# EAGLE board ottawa-badge-panel (EAGLE 5.12)
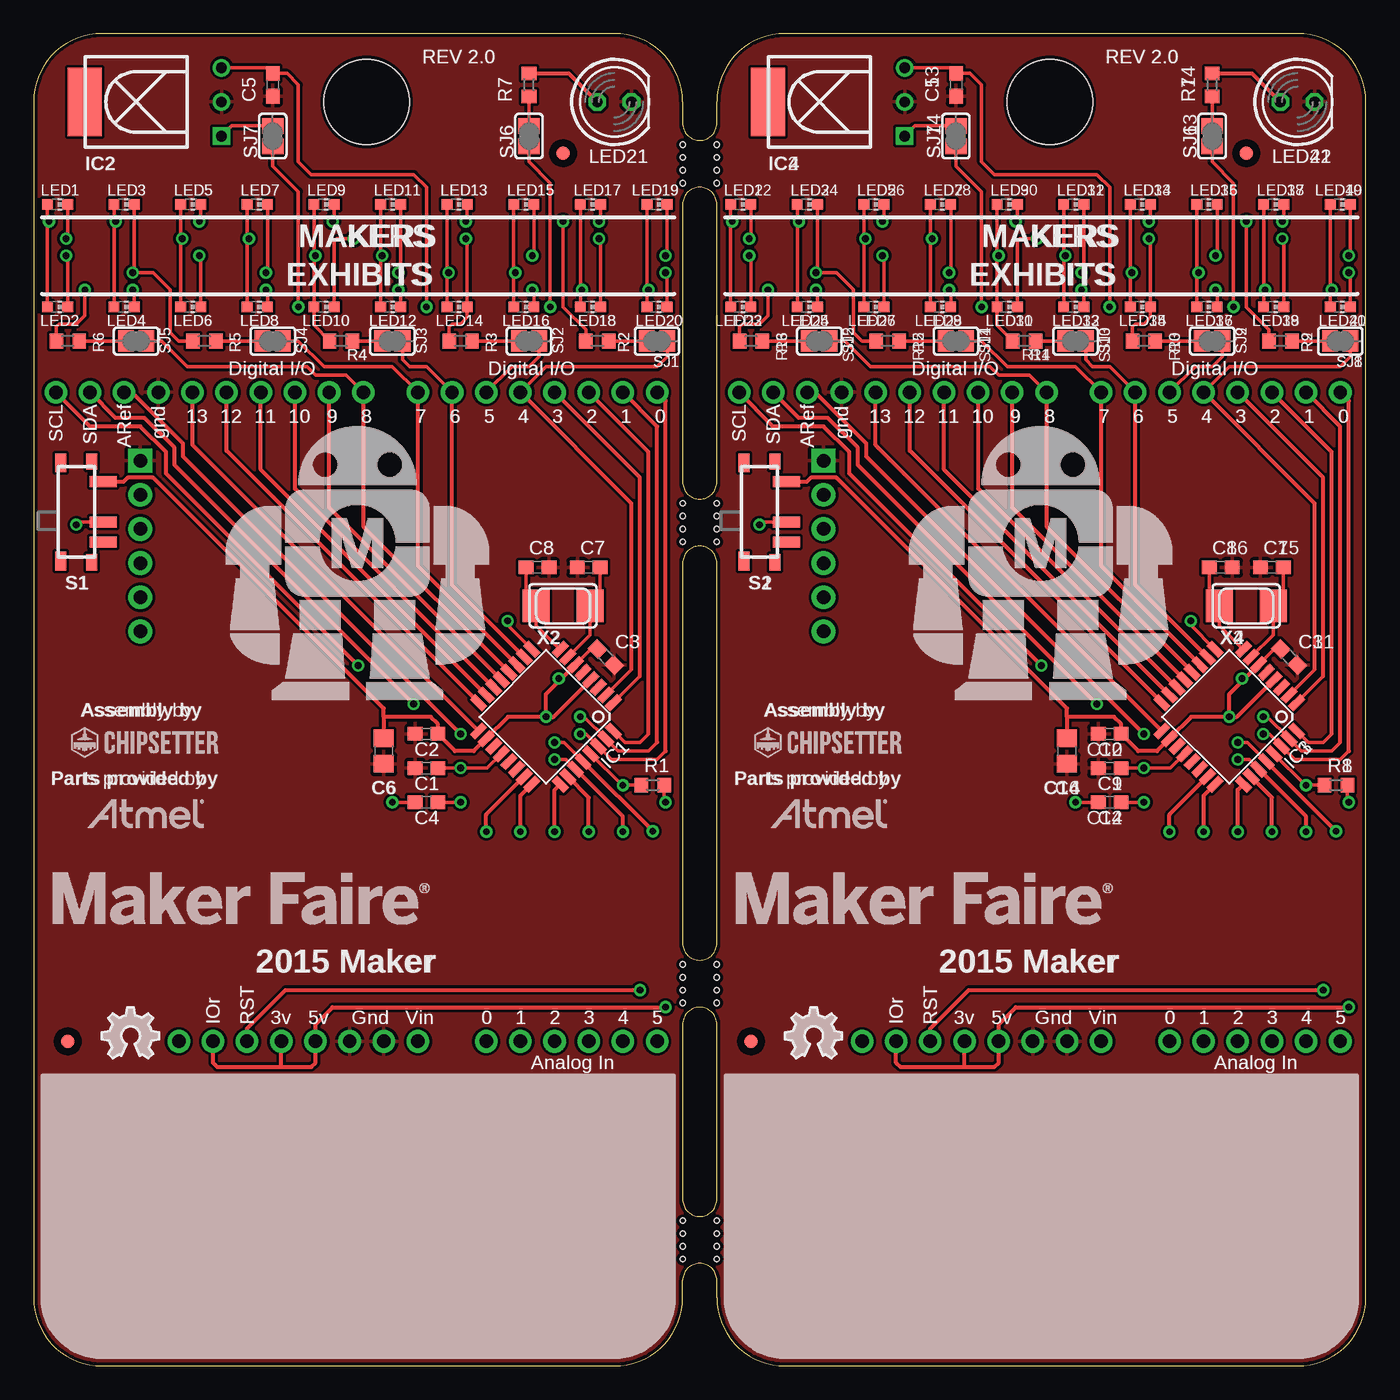
[diagram p0: board, top side]
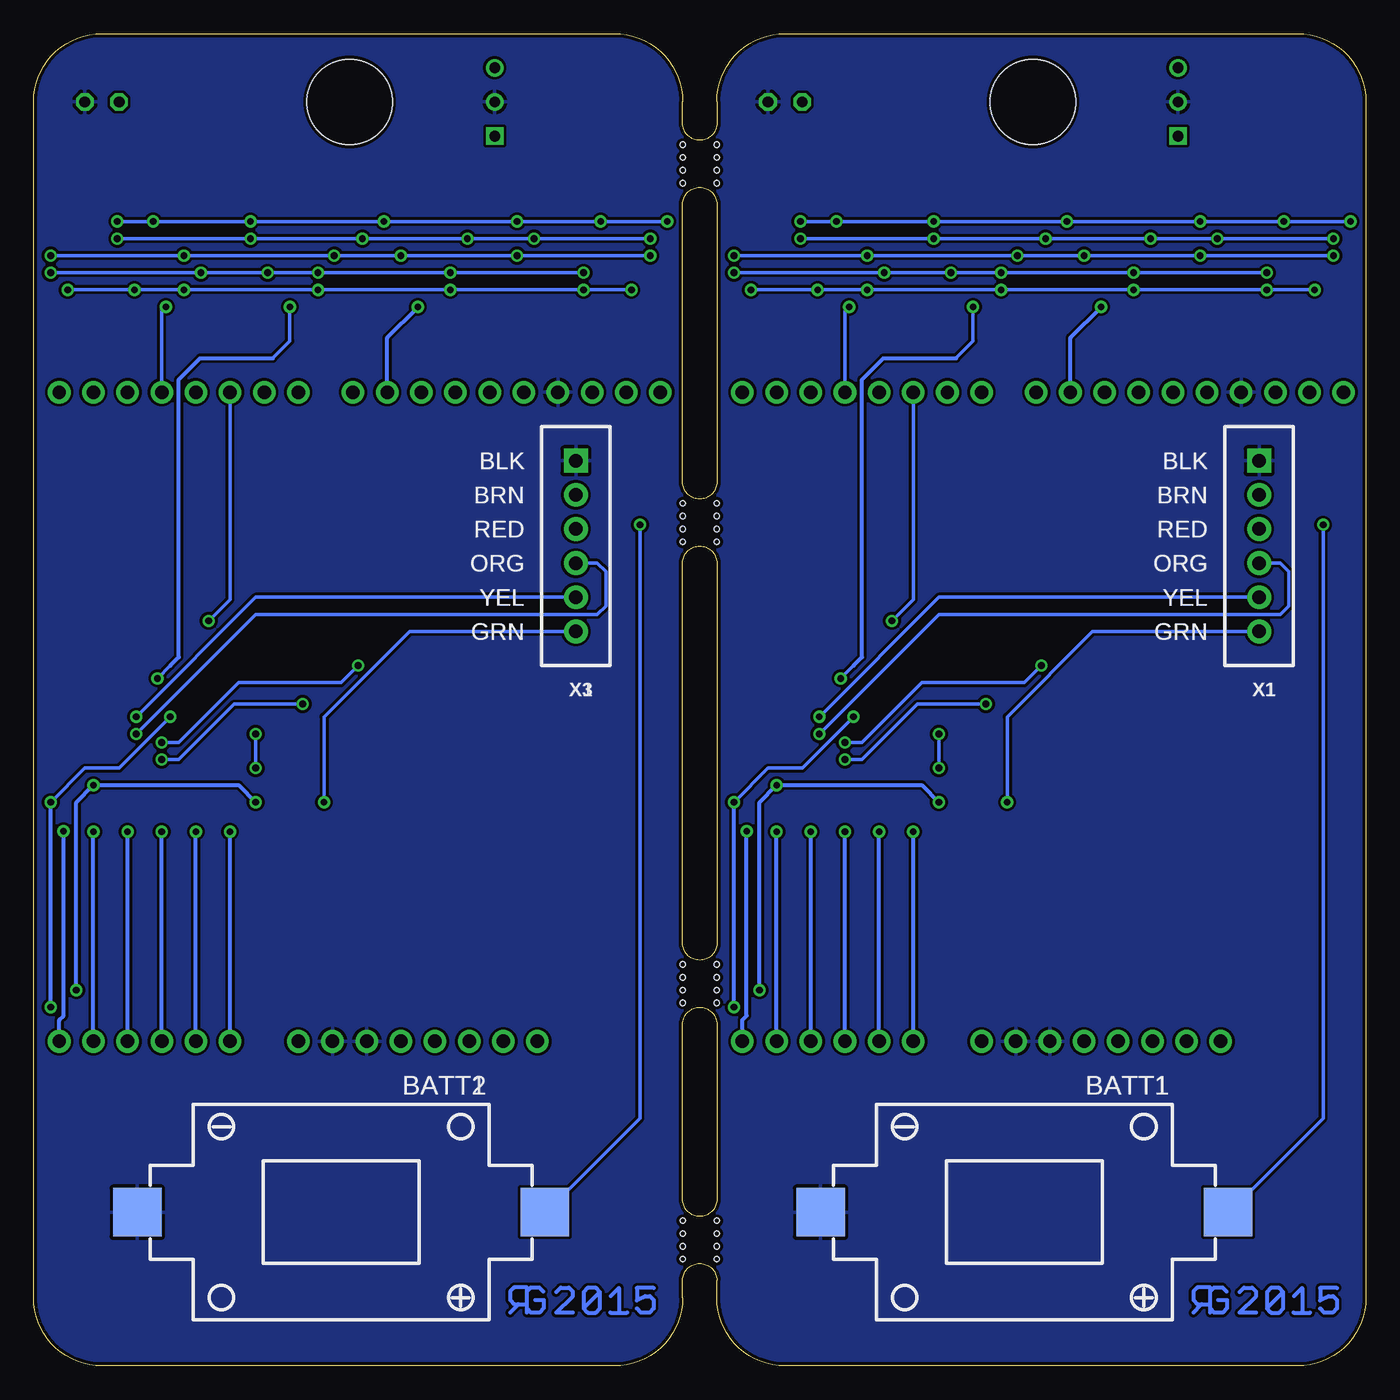
[diagram p1: board, bottom side, seen from below]

Size 99.06 x 99.06 mm. Coordinates in mm from the lower left corner, seen from the top.
Outline: 5.08,99.06 arc90 0,93.98 0,5.08 arc90 5.08,0 43.18,0 arc90 48.26,5.08 48.26,6.35 arc-90 49.53,7.62 arc-90 50.8,6.35 50.8,5.08 arc90 55.88,0 93.98,0 arc90 99.06,5.08 99.06,93.98 arc90 93.98,99.06 55.88,99.06 arc90 50.8,93.98 50.8,92.39 arc-90 49.53,91.12 arc-90 48.26,92.39 48.26,93.98 arc90 43.18,99.06 5.08,99.06
Outline: 50.8,86.36 arc90 49.53,87.63 arc90 48.26,86.36 48.26,65.72 arc90 49.53,64.45 arc90 50.8,65.72 50.8,86.36
Outline: 48.26,12.38 arc90 49.53,11.11 arc90 50.8,12.38 50.8,25.4 arc90 49.53,26.67 arc90 48.26,25.4 48.26,12.38
Outline: 48.26,31.43 arc90 49.53,30.16 arc90 50.8,31.43 50.8,59.69 arc90 49.53,60.96 arc90 48.26,59.69 48.26,31.43
Copper layers (1*16): Top 0.035mm / dielectric 1.5mm / Bottom 0.035mm
Design rules "default *": minimum track width 10mil, minimum drill 0.5mm, track to track 8mil, track to pad 8mil, pad to pad 8mil, via to via 8mil, smd to smd 8mil, copper to edge 10mil, drill to drill 8mil, minimum pad ring 10mil, minimum via ring 8mil, stop-mask expansion 4mil, vias tented up to drill 20mil, thermal gap 10mil
Holes 6.35 mm at 24.77,93.98 75.56,93.98
Holes 0.4 mm at 48.26,90.81 48.26,89.85 48.26,88.9 48.26,87.95 50.8,90.81 50.8,89.85 50.8,88.9 50.8,87.95 48.26,10.79 48.26,9.84 48.26,8.89 48.26,7.94 50.8,10.79 50.8,9.84 50.8,8.89 50.8,7.94 48.26,29.84 48.26,28.89 48.26,27.94 48.26,26.99 50.8,29.84 50.8,28.89 50.8,27.94 50.8,26.99 48.26,64.14 48.26,63.18 48.26,62.23 48.26,61.28 50.8,64.14 50.8,63.18 50.8,62.23 50.8,61.28

## Footprints (pad centres in the part's own frame; a part is rotated, then mirrored left to right if it is on the bottom)
2032SMD = smd 3.6 x 3.6: + -15.15,0; - 15.15,0
C0603 = smd 1.1 x 1: 1 -0.85,0; 2 0.85,0
C0805 = smd 1.3 x 1.5: 1 -0.95,0; 2 0.95,0
TQFP32-08 = smd 1.27 x 0.559: 1 -4.293,2.8; 2 -4.293,2; 3 -4.293,1.2; 4 -4.293,0.4; 5 -4.293,-0.4; 6 -4.293,-1.2; 7 -4.293,-2; 8 -4.293,-2.8; 17 4.293,-2.8; 18 4.293,-2; 19 4.293,-1.2; 20 4.293,-0.4; 21 4.293,0.4; 22 4.293,1.2; 23 4.293,2; 24 4.293,2.8 | smd 0.559 x 1.27: 9 -2.8,-4.293; 10 -2,-4.293; 11 -1.2,-4.293; 12 -0.4,-4.293; 13 0.4,-4.293; 14 1.2,-4.293; 15 2,-4.293; 16 2.8,-4.293; 25 2.8,4.293; 26 2,4.293; 27 1.2,4.293; 28 0.4,4.293; 29 -0.4,4.293; 30 -1.2,4.293; 31 -2,4.293; 32 -2.8,4.293
VS1838B-H = drill 0.8 square: 1 2.54,6.35 | drill 0.8 round: 2 0,6.35; 3 -2.54,6.35 | smd 5.08 x 2.54: CASE 0,-3.81
CHIP-LED0603 = smd 0.8 x 0.8: A 0,-0.75; C 0,0.75
LED5MM = drill 0.813 octagon: A -1.27,0; K 1.27,0
R0603 = smd 1 x 1.1: 1 -0.85,0; 2 0.85,0
SPDT-SMT = smd 2 x 0.8: 1 -2,-2.25; 2 -2,0.75; 3 -2,2.25 | smd 0.8 x 1.2: A -1.15,3.75; D -1.15,-3.75 | smd 0.8 x 1.4: B 1.15,3.65; C 1.15,-3.65
SJ = smd 1.168 x 1.6: 1 -0.762,0; 2 0.762,0
ARDUINOR3-NOISP = drill 1 pad 1.676 round: 3V 17.78,2.54; 5V 20.32,2.54; A0 33.02,2.54; A1 35.56,2.54; A2 38.1,2.54; A3 40.64,2.54; A4 43.18,2.54; A5 45.72,2.54; AREF 6.096,50.8; D0 45.72,50.8; D1 43.18,50.8; D2 40.64,50.8; D3 38.1,50.8; D4 35.56,50.8; D5 33.02,50.8; D6 30.48,50.8; D7 27.94,50.8; D8 23.876,50.8; D9 21.336,50.8; D10 18.796,50.8; D11 16.256,50.8; D12 13.716,50.8; D13 11.176,50.8; GND 8.636,50.8; GND1 25.4,2.54; GND2 22.86,2.54; IOREF 12.7,2.54; RESERVED 10.16,2.54; RESET 15.24,2.54; SCL 1.016,50.8; SDA 3.556,50.8; VIN 27.94,2.54
FIDUCIAL_1MM = smd 1 x 1: 1 0,0
USBCABLE-0.100 = drill 1 pad 1.778 square: 1 0,-7.62 | drill 1 pad 1.778 round: 2 0,-5.08; 3 0,-2.54; 4 0,0; 5 0,2.54; 6 0,5.08
NX5032 = smd 2 x 2.4: P$1 2,0; P$2 -2,0

## Placement (x,y rotation side)
BATT1  2032SMD  [2032SMD]  25.4,11.43 180 bottom
BATT2  2032SMD  [2032SMD]  76.2,11.43 180 bottom
C1  100n  [C0603]  29.21,44.45 180 top
C2  100n  [C0603]  29.21,46.99 180 top
C3  100n  [C0603]  42.55,52.7 315 top
C4  100n  [C0603]  29.21,41.91 0 top
C5  100n  [C0603]  17.78,95.25 270 top
C6  1u  [C0805]  26.04,45.72 270 top
C7  18p  [C0603]  41.27,59.37 180 top
C8  18p  [C0603]  37.47,59.37 0 top
C9  100n  [C0603]  80.01,44.45 180 top
C10  100n  [C0603]  80.01,46.99 180 top
C11  100n  [C0603]  93.34,52.7 315 top
C12  100n  [C0603]  80.01,41.91 0 top
C13  100n  [C0603]  68.58,95.25 270 top
C14  1u  [C0805]  76.83,45.72 270 top
C15  18p  [C0603]  92.08,59.37 180 top
C16  18p  [C0603]  88.27,59.37 0 top
IC1  ATMEGA328P-AU  [TQFP32-08]  38.1,48.26 225 top
IC2  VS1838B-H  [VS1838B-H]  7.62,93.98 270 top
IC3  ATMEGA328P-AU  [TQFP32-08]  88.9,48.26 225 top
IC4  VS1838B-H  [VS1838B-H]  58.42,93.98 270 top
LED1  [CHIP-LED0603]  1.78,86.36 270 top
LED2  [CHIP-LED0603]  1.78,78.74 270 top
LED3  [CHIP-LED0603]  6.73,86.36 270 top
LED4  [CHIP-LED0603]  6.73,78.74 270 top
LED5  [CHIP-LED0603]  11.68,86.36 270 top
LED6  [CHIP-LED0603]  11.68,78.74 270 top
LED7  [CHIP-LED0603]  16.64,86.36 270 top
LED8  [CHIP-LED0603]  16.64,78.74 270 top
LED9  [CHIP-LED0603]  21.59,86.36 270 top
LED10  [CHIP-LED0603]  21.59,78.74 270 top
LED11  [CHIP-LED0603]  26.54,86.36 270 top
LED12  [CHIP-LED0603]  26.54,78.74 270 top
LED13  [CHIP-LED0603]  31.5,86.36 270 top
LED14  [CHIP-LED0603]  31.5,78.74 270 top
LED15  [CHIP-LED0603]  36.45,86.36 270 top
LED16  [CHIP-LED0603]  36.45,78.74 270 top
LED17  [CHIP-LED0603]  41.4,86.36 270 top
LED18  [CHIP-LED0603]  41.4,78.74 270 top
LED19  [CHIP-LED0603]  46.35,86.36 270 top
LED20  [CHIP-LED0603]  46.35,78.74 270 top
LED21  [LED5MM]  43.18,93.98 0 top
LED22  [CHIP-LED0603]  52.58,86.36 270 top
LED23  [CHIP-LED0603]  52.58,78.74 270 top
LED24  [CHIP-LED0603]  57.53,86.36 270 top
LED25  [CHIP-LED0603]  57.53,78.74 270 top
LED26  [CHIP-LED0603]  62.48,86.36 270 top
LED27  [CHIP-LED0603]  62.48,78.74 270 top
LED28  [CHIP-LED0603]  67.44,86.36 270 top
LED29  [CHIP-LED0603]  67.44,78.74 270 top
LED30  [CHIP-LED0603]  72.39,86.36 270 top
LED31  [CHIP-LED0603]  72.39,78.74 270 top
LED32  [CHIP-LED0603]  77.34,86.36 270 top
LED33  [CHIP-LED0603]  77.34,78.74 270 top
LED34  [CHIP-LED0603]  82.3,86.36 270 top
LED35  [CHIP-LED0603]  82.3,78.74 270 top
LED36  [CHIP-LED0603]  87.25,86.36 270 top
LED37  [CHIP-LED0603]  87.25,78.74 270 top
LED38  [CHIP-LED0603]  92.2,86.36 270 top
LED39  [CHIP-LED0603]  92.2,78.74 270 top
LED40  [CHIP-LED0603]  97.16,86.36 270 top
LED41  [CHIP-LED0603]  97.16,78.74 270 top
LED42  [LED5MM]  93.98,93.98 0 top
LOGO1  OSHW_LOGO_FILLX0150-NT  [OSHW_FILLX150_NOTEXT]  5.08,22.86 0 top
LOGO2  OSHW_LOGO_FILLX0150-NT  [OSHW_FILLX150_NOTEXT]  55.88,22.86 0 top
R1  10K  [R0603]  46.04,43.18 0 top
R2  [R0603]  41.91,76.2 180 top
R3  [R0603]  31.75,76.2 180 top
R4  [R0603]  22.86,76.2 180 top
R5  [R0603]  12.7,76.2 180 top
R6  [R0603]  2.54,76.2 180 top
R7  1K  [R0603]  36.83,95.25 90 top
R8  10K  [R0603]  96.84,43.18 0 top
R9  [R0603]  92.71,76.2 180 top
R10  [R0603]  82.55,76.2 180 top
R11  [R0603]  73.66,76.2 180 top
R12  [R0603]  63.5,76.2 180 top
R13  [R0603]  53.34,76.2 180 top
R14  1K  [R0603]  87.63,95.25 90 top
S1  SPDT-SMT  [SPDT-SMT]  3.17,63.5 180 top
S2  SPDT-SMT  [SPDT-SMT]  53.98,63.5 180 top
SJ1  [SJ]  46.35,76.2 180 top
SJ2  [SJ]  36.83,76.2 180 top
SJ3  [SJ]  26.67,76.2 180 top
SJ4  [SJ]  17.78,76.2 180 top
SJ5  [SJ]  7.62,76.2 180 top
SJ6  [SJ]  36.83,91.44 90 top
SJ7  [SJ]  17.78,91.44 90 top
SJ8  [SJ]  97.16,76.2 180 top
SJ9  [SJ]  87.63,76.2 180 top
SJ10  [SJ]  77.47,76.2 180 top
SJ11  [SJ]  68.58,76.2 180 top
SJ12  [SJ]  58.42,76.2 180 top
SJ13  [SJ]  87.63,91.44 90 top
SJ14  [SJ]  68.58,91.44 90 top
U1  ARDUINOR3-NOISP  [ARDUINOR3-NOISP]  0.64,21.59 0 top
U2  ARDUINOR3-NOISP  [ARDUINOR3-NOISP]  51.44,21.59 0 top
U$1  [MAKER-FAIRE-OTTAWA-900DPI]  0.32,31.75 0 top
U$2  [MAKEY-ROBOT]  14.29,49.53 0 top
U$3  FIDUCIAL  [FIDUCIAL_1MM]  39.37,90.17 0 top
U$4  [RGLOGO_SMALL_2015]  11.43,3.81 0 bottom
U$5  FIDUCIAL  [FIDUCIAL_1MM]  2.54,24.13 0 top
U$6  [ATMEL-LOGO-HALFINCH]  1.91,36.83 0 top
U$7  [RGLOGO_SMALL_2015]  62.23,3.81 0 bottom
U$8  [CHIPSETTER-TEXT-100MIL-SILK]  8.26,46.35 0 top
U$9  [MAKER-FAIRE-OTTAWA-900DPI]  51.12,31.75 0 top
U$10  [MAKEY-ROBOT]  65.09,49.53 0 top
U$11  FIDUCIAL  [FIDUCIAL_1MM]  90.17,90.17 0 top
U$12  FIDUCIAL  [FIDUCIAL_1MM]  53.34,24.13 0 top
U$13  [ATMEL-LOGO-HALFINCH]  52.7,36.83 0 top
U$14  [CHIPSETTER-TEXT-100MIL-SILK]  59.05,46.35 0 top
X1  TTL-232R-5V  [USBCABLE-0.100]  7.94,59.69 180 bottom
X2  [NX5032]  39.37,56.52 0 top
X3  TTL-232R-5V  [USBCABLE-0.100]  58.74,59.69 180 bottom
X4  [NX5032]  90.17,56.52 0 top

## Library data of the parts
BATT1 BATT2 = rbg-4ucon-battery
C1-C16 R1-R14 = rcl
IC1 IC3 = avr-4
IC2 IC4 = rbg-china-vs1838b
LED1-LED20 LED22-LED41 = led; EAGLEUP: CHIPLED_0603
LED21 LED42 = led
LOGO1 LOGO2 = ohw-logo
S1 S2 = smt-spdt-aliexpress
SJ1-SJ14 = jumper
U1 U2 = rbg-arduino-shield
U$1 U$2 U$6 U$9 U$10 U$13 = ottawa-artwork
U$3 U$5 U$11 U$12 X2 X4 = adafruit
U$4 U$7 = rbg-logos
U$8 U$14 = chipsetter-logos-516
X1 X3 = rbg-ftdi-usb

## Nets
ANALOG0: IC1.23 U1.A0
ANALOG1: IC1.24 U1.A1
ANALOG2: IC1.25 U1.A2
ANALOG3: IC1.26 U1.A3
ANALOG4: IC1.27 U1.A4 U1.SDA
ANALOG5: IC1.28 U1.A5 U1.SCL
ANALOG6: IC3.23 U2.A0
ANALOG7: IC3.24 U2.A1
ANALOG8: IC3.25 U2.A2
ANALOG9: IC3.26 U2.A3
ANALOG10: IC3.27 U2.A4 U2.SDA
ANALOG11: IC3.28 U2.A5 U2.SCL
AREF: C1.1 IC1.20 U1.AREF
AREF1: C9.1 IC3.20 U2.AREF
CHARLIEPLEX1: LED1.A LED2.A LED3.A LED4.A LED5.C LED9.C LED13.C LED17.C R2.2
CHARLIEPLEX2: LED1.C LED5.A LED6.A LED7.A LED8.A LED10.C LED14.C LED18.C R3.2
CHARLIEPLEX3: LED2.C LED6.C LED9.A LED10.A LED11.A LED12.A LED15.C LED19.C R4.2
CHARLIEPLEX4: LED3.C LED7.C LED11.C LED13.A LED14.A LED15.A LED16.A LED20.C R5.2
CHARLIEPLEX5: LED4.C LED8.C LED12.C LED16.C LED17.A LED18.A LED19.A LED20.A R6.2
CHARLIEPLEX6: LED22.A LED23.A LED24.A LED25.A LED26.C LED30.C LED34.C LED38.C R9.2
CHARLIEPLEX7: LED22.C LED26.A LED27.A LED28.A LED29.A LED31.C LED35.C LED39.C R10.2
CHARLIEPLEX8: LED23.C LED27.C LED30.A LED31.A LED32.A LED33.A LED36.C LED40.C R11.2
CHARLIEPLEX9: LED25.C LED29.C LED33.C LED37.C LED38.A LED39.A LED40.A LED41.A R13.2
CHARLIEPLEX10: LED24.C LED28.C LED32.C LED34.A LED35.A LED36.A LED37.A LED41.C R12.2
DIGITAL0: IC1.30 U1.D0 X1.4
DIGITAL1: IC1.31 U1.D1 X1.5
DIGITAL2: IC1.32 U1.D2
DIGITAL3: IC1.1 SJ6.1 U1.D3
DIGITAL4: IC1.2 SJ1.1 U1.D4
DIGITAL5: IC1.9 SJ2.1 U1.D5
DIGITAL6: IC1.10 SJ3.1 U1.D6
DIGITAL7: IC1.11 SJ4.1 U1.D7
DIGITAL8: IC1.12 SJ5.1 U1.D8
DIGITAL9: IC1.13 SJ7.1 U1.D9
DIGITAL10: IC1.14 U1.D10
DIGITAL11: IC1.15 U1.D11
DIGITAL12: IC1.16 U1.D12
DIGITAL13: IC1.17 U1.D13
DIGITAL14: IC3.30 U2.D0 X3.4
DIGITAL15: IC3.31 U2.D1 X3.5
DIGITAL16: IC3.32 U2.D2
DIGITAL17: IC3.1 SJ13.1 U2.D3
DIGITAL18: IC3.2 SJ8.1 U2.D4
DIGITAL19: IC3.9 SJ9.1 U2.D5
DIGITAL20: IC3.10 SJ10.1 U2.D6
DIGITAL21: IC3.11 SJ11.1 U2.D7
DIGITAL22: IC3.12 SJ12.1 U2.D8
DIGITAL23: IC3.13 SJ14.1 U2.D9
DIGITAL24: IC3.14 U2.D10
DIGITAL25: IC3.15 U2.D11
DIGITAL26: IC3.16 U2.D12
DIGITAL27: IC3.17 U2.D13
GND: BATT1.- C1.2 C2.2 C3.2 C5.2 C6.2 C7.2 C8.2 IC1.3 IC1.5 IC1.21 IC2.2 LED21.K U1.GND U1.GND1 U1.GND2 X1.1
GND1: BATT2.- C9.2 C10.2 C11.2 C13.2 C14.2 C15.2 C16.2 IC3.3 IC3.5 IC3.21 IC4.2 LED42.K U2.GND U2.GND1 U2.GND2 X3.1
N$1: R2.1 SJ1.2
N$3: R3.1 SJ2.2
N$5: R4.1 SJ3.2
N$6: BATT1.+ S1.2
N$7: R5.1 SJ4.2
N$8: R7.1 SJ6.2
N$9: R6.1 SJ5.2
N$10: C7.1 IC1.7 X2.P$1
N$11: IC2.1 SJ7.2
N$12: C4.1 X1.6
N$18: C8.1 IC1.8 X2.P$2
N$19: R9.1 SJ8.2
N$20: R10.1 SJ9.2
N$21: R11.1 SJ10.2
N$22: R12.1 SJ11.2
N$23: R13.1 SJ12.2
N$24: LED42.A R14.2
N$25: R14.1 SJ13.2
N$26: IC4.1 SJ14.2
N$27: C12.1 X3.6
N$29: LED21.A R7.2
N$36: BATT2.+ S2.2
N$37: C15.1 IC3.7 X4.P$1
N$38: C16.1 IC3.8 X4.P$2
RESET: C4.2 IC1.29 R1.1 U1.RESET
RESET1: C12.2 IC3.29 R8.1 U2.RESET
VCC: C2.1 C3.1 C5.1 C6.1 IC1.4 IC1.6 IC1.18 IC2.3 R1.2 S1.1 U1.3V U1.5V U1.IOREF
VCC1: C10.1 C11.1 C13.1 C14.1 IC3.4 IC3.6 IC3.18 IC4.3 R8.2 S2.1 U2.3V U2.5V U2.IOREF
VIN: U1.VIN
VIN1: U2.VIN

## Tracks (layer width: path | path; a pad name or v marks a point on that pad's centre or on a via)
ANALOG0  (via drill 0.5)
  Top 0.305: v33.66,39.72 33.66,40.99 IC1.23
  Bottom 0.305: U1.A0 v33.66,39.72
ANALOG1  (via drill 0.5)
  Top 0.305: v36.2,39.72 36.2,42.4 IC1.24
  Bottom 0.305: U1.A1 v36.2,39.72
ANALOG2  (via drill 0.5)
  Top 0.305: v38.73,39.72 38.73,42.82 IC1.25
  Bottom 0.305: U1.A2 v38.73,39.72
ANALOG3  (via drill 0.5)
  Top 0.305: v41.27,39.72 41.27,42.26 IC1.26
  Bottom 0.305: U1.A3 v41.27,39.72
ANALOG4  (via drill 0.5)
  Top 0.254: IC1.27 39.58,45.09 v38.73,45.09
  Top 0.305: U1.SDA 6.1,70.48 8.26,70.48 10.48,68.26 10.48,66.99 v28.26,49.21 | v43.81,39.72 43.81,40.85 IC1.27
  Bottom 0.254: v38.73,45.09 37.47,45.09 33.34,49.21 v28.26,49.21
  Bottom 0.305: U1.A4 v43.81,39.72
ANALOG5  (via drill 0.5)
  Top 0.254: IC1.28 39.44,46.35 v38.73,46.35
  Top 0.305: v46.04,39.76 IC1.28 | U1.SCL 4.19,69.85 7.94,69.85 9.84,67.94 9.84,66.36 v24.13,52.07
  Bottom 0.254: v38.73,46.35 37.47,46.35 33.02,50.8 25.4,50.8 v24.13,52.07
  Bottom 0.305: U1.A5 46.35,25.72 46.04,26.04 v46.04,39.76
ANALOG6  (via drill 0.5)
  Top 0.305: v84.45,39.72 84.45,40.99 IC3.23
  Bottom 0.305: U2.A0 v84.45,39.72
ANALOG7  (via drill 0.5)
  Top 0.305: v87,39.72 87,42.4 IC3.24
  Bottom 0.305: U2.A1 v87,39.72
ANALOG8  (via drill 0.5)
  Top 0.305: v89.53,39.72 89.53,42.82 IC3.25
  Bottom 0.305: U2.A2 v89.53,39.72
ANALOG9  (via drill 0.5)
  Top 0.305: v92.08,39.72 92.08,42.26 IC3.26
  Bottom 0.305: U2.A3 v92.08,39.72
ANALOG10  (via drill 0.5)
  Top 0.254: IC3.27 90.38,45.09 v89.53,45.09
  Top 0.305: U2.SDA 56.9,70.48 59.05,70.48 61.28,68.26 61.28,66.99 v79.06,49.21 | v94.61,39.72 94.61,40.85 IC3.27
  Bottom 0.254: v89.53,45.09 88.27,45.09 84.14,49.21 v79.06,49.21
  Bottom 0.305: U2.A4 v94.61,39.72
ANALOG11  (via drill 0.5)
  Top 0.254: IC3.28 90.24,46.35 v89.53,46.35
  Top 0.305: v96.84,39.76 IC3.28 | U2.SCL 54.99,69.85 58.74,69.85 60.64,67.94 60.64,66.36 v74.93,52.07
  Bottom 0.254: v89.53,46.35 88.27,46.35 83.82,50.8 76.2,50.8 v74.93,52.07
  Bottom 0.305: U2.A5 97.16,25.72 96.84,26.04 v96.84,39.76
AREF  (via drill 0.5)
  Top 0.254: IC1.20 33.72,44.45 v31.75,44.45 C1.1
  Top 0.305: v31.75,46.99 11.11,67.63 11.11,68.58 7.3,72.39 U1.AREF
  Bottom 0.254: v31.75,44.45 v31.75,46.99
AREF1  (via drill 0.5)
  Top 0.254: IC3.20 84.52,44.45 v82.55,44.45 C9.1
  Top 0.305: v82.55,46.99 61.91,67.63 61.91,68.58 58.1,72.39 U2.AREF
  Bottom 0.254: v82.55,44.45 v82.55,46.99
CHARLIEPLEX1  (via drill 0.5)
  Top 0.254: R2.2 41.06,77.05 39.37,78.74 v39.37,85.09 | LED2.A 1.03,84.97 v1.14,85.09 1.03,85.2 LED1.A | LED17.C 42.15,85.2 v42.04,85.09 | LED13.C 32.25,85.2 v32.13,85.09 | LED4.A 5.98,84.97 v6.1,85.09 5.98,85.2 LED3.A | LED5.C 12.43,85.2 v12.32,85.09 | LED9.C 22.34,85.2 v22.23,85.09
  Bottom 0.254: v1.14,85.09 v6.1,85.09 v12.32,85.09 v22.23,85.09 v32.13,85.09 v39.37,85.09 v42.04,85.09
CHARLIEPLEX2  (via drill 0.5)
  Top 0.254: LED1.C 2.53,83.94 v2.41,83.82 | LED18.C 42.15,83.7 v42.04,83.82 | v32.13,83.82 32.25,83.7 LED14.C 32.25,77.97 31.75,77.47 31.11,77.47 30.9,77.25 R3.2 | LED5.A 10.93,83.94 v11.05,83.82 10.93,83.7 LED6.A | LED7.A 15.89,83.94 v16,83.82 15.89,83.7 LED8.A | LED10.C 22.34,83.62 22.54,83.82 v23.81,83.82
  Bottom 0.254: v2.41,83.82 v11.05,83.82 v16,83.82 v23.81,83.82 v32.13,83.82 v42.04,83.82
CHARLIEPLEX3  (via drill 0.5)
  Top 0.254: LED2.C 2.53,82.44 v2.41,82.55 | LED19.C 47.1,82.67 v46.99,82.55 | LED15.C 37.2,82.67 v37.08,82.55 | LED11.A 25.79,82.67 v25.91,82.55 25.79,82.44 LED12.A | LED6.C 12.43,82.44 v12.32,82.55 | LED9.A 20.84,82.67 v20.95,82.55 20.84,82.44 LED10.A 20.84,77.37 R4.2
  Bottom 0.254: v2.41,82.55 v12.32,82.55 v20.95,82.55 v25.91,82.55 v37.08,82.55 v46.99,82.55
CHARLIEPLEX4  (via drill 0.5)
  Top 0.254: R5.2 10.79,76.2 10.16,76.83 10.16,80.01 8.89,81.28 v7.37,81.28 7.48,81.39 LED3.C | LED20.C 47.1,81.17 v46.99,81.28 | LED15.A 35.7,81.39 v35.81,81.28 35.7,81.17 LED16.A | LED14.A 30.75,81.17 v30.86,81.28 30.75,81.39 LED13.A | LED11.C 27.29,81.46 v27.11,81.28 | LED7.C 17.39,81.39 v17.27,81.28
  Bottom 0.254: v7.37,81.28 v17.27,81.28 v27.11,81.28 v30.86,81.28 v35.81,81.28 v46.99,81.28
CHARLIEPLEX5  (via drill 0.5)
  Top 0.254: v3.81,80.01 3.81,78.11 3.17,77.47 1.91,77.47 1.69,77.25 R6.2 | LED20.A 45.6,79.89 v45.72,80.01 45.6,80.12 LED19.A | LED17.A 40.65,80.12 v40.77,80.01 40.65,79.89 LED18.A | LED16.C 37.2,79.89 v37.08,80.01 | LED4.C 7.48,79.89 v7.37,80.01 | LED8.C 17.39,79.89 v17.27,80.01 | LED12.C 27.29,79.83 v27.11,80.01
  Bottom 0.254: v3.81,80.01 v7.37,80.01 v17.27,80.01 v27.11,80.01 v37.08,80.01 v40.77,80.01 v45.72,80.01
CHARLIEPLEX6  (via drill 0.5)
  Top 0.254: R9.2 91.86,77.05 90.17,78.74 v90.17,85.09 | LED23.A 51.83,84.97 v51.94,85.09 51.83,85.2 LED22.A | LED38.C 92.95,85.2 v92.84,85.09 | LED34.C 83.05,85.2 v82.93,85.09 | LED25.A 56.78,84.97 v56.9,85.09 56.78,85.2 LED24.A | LED26.C 63.23,85.2 v63.12,85.09 | LED30.C 73.14,85.2 v73.03,85.09
  Bottom 0.254: v51.94,85.09 v56.9,85.09 v63.12,85.09 v73.03,85.09 v82.93,85.09 v90.17,85.09 v92.84,85.09
CHARLIEPLEX7  (via drill 0.5)
  Top 0.254: LED22.C 53.33,83.94 v53.21,83.82 | LED39.C 92.95,83.7 v92.84,83.82 | v82.93,83.82 83.05,83.7 LED35.C 83.05,77.97 82.55,77.47 81.92,77.47 81.7,77.25 R10.2 | LED26.A 61.73,83.94 v61.85,83.82 61.73,83.7 LED27.A | LED28.A 66.69,83.94 v66.8,83.82 66.69,83.7 LED29.A | LED31.C 73.14,83.62 73.34,83.82 v74.61,83.82
  Bottom 0.254: v53.21,83.82 v61.85,83.82 v66.8,83.82 v74.61,83.82 v82.93,83.82 v92.84,83.82
CHARLIEPLEX8  (via drill 0.5)
  Top 0.254: LED23.C 53.33,82.44 v53.21,82.55 | LED40.C 97.91,82.67 v97.79,82.55 | LED36.C 88,82.67 v87.88,82.55 | LED32.A 76.59,82.67 v76.71,82.55 76.59,82.44 LED33.A | LED27.C 63.23,82.44 v63.12,82.55 | LED30.A 71.64,82.67 v71.75,82.55 71.64,82.44 LED31.A 71.64,77.37 R11.2
  Bottom 0.254: v53.21,82.55 v63.12,82.55 v71.75,82.55 v76.71,82.55 v87.88,82.55 v97.79,82.55
CHARLIEPLEX9  (via drill 0.5)
  Top 0.254: v54.61,80.01 54.61,78.11 53.98,77.47 52.7,77.47 52.49,77.25 R13.2 | LED41.A 96.41,79.89 v96.52,80.01 96.41,80.12 LED40.A | LED38.A 91.45,80.12 v91.57,80.01 91.45,79.89 LED39.A | LED37.C 88,79.89 v87.88,80.01 | LED25.C 58.28,79.89 v58.17,80.01 | LED29.C 68.19,79.89 v68.07,80.01 | LED33.C 78.09,79.83 v77.92,80.01
  Bottom 0.254: v54.61,80.01 v58.17,80.01 v68.07,80.01 v77.92,80.01 v87.88,80.01 v91.57,80.01 v96.52,80.01
CHARLIEPLEX10  (via drill 0.5)
  Top 0.254: R12.2 61.59,76.2 60.96,76.83 60.96,80.01 59.69,81.28 v58.17,81.28 58.28,81.39 LED24.C | LED41.C 97.91,81.17 v97.79,81.28 | LED36.A 86.5,81.39 v86.61,81.28 86.5,81.17 LED37.A | LED35.A 81.55,81.17 v81.66,81.28 81.55,81.39 LED34.A | LED32.C 78.09,81.46 v77.92,81.28 | LED28.C 68.19,81.39 v68.07,81.28
  Bottom 0.254: v58.17,81.28 v68.07,81.28 v77.92,81.28 v81.66,81.28 v86.61,81.28 v97.79,81.28
DIGITAL0  (via drill 0.5)
  Top 0.254: 46.99,45.72 46.35,45.09 42.97,45.09 IC1.30 41.07,46.99 v40.64,46.99
  Top 0.305: 46.99,45.72 46.99,71.75 U1.D0
  Bottom 0.254: v40.64,46.99 31.75,55.88 6.35,55.88 5.71,56.52 5.71,59.05 6.35,59.69 X1.4
DIGITAL1  (via drill 0.5)
  Top 0.254: 46.35,46.35 45.72,45.72 43.47,45.72 IC1.31 40.93,48.26 v40.64,48.26
  Top 0.305: 46.35,46.35 46.35,69.85 U1.D1
  Bottom 0.254: X1.5 31.75,57.15 v40.64,48.26
DIGITAL2
  Top 0.254: 45.72,46.99 45.09,46.35 43.97,46.35 IC1.32
  Top 0.305: 45.72,46.99 45.72,67.94 U1.D2
DIGITAL3  (via drill 0.5)
  Top 0.254: IC1.1 45.09,51.28 | v38.42,78.74 38.42,87.95 36.83,89.53 SJ6.1
  Top 0.305: 45.09,51.28 45.09,66.04 U1.D3
  Bottom 0.254: U1.D3 38.73,78.42 v38.42,78.74
DIGITAL4
  Top 0.254: IC1.2 44.45,51.78 | SJ1.1 47.12,75.06 46.35,74.3 38.1,74.3 U1.D4
  Top 0.305: 44.45,51.78 44.45,64.14 U1.D4
DIGITAL5  (via drill 0.5)
  Top 0.254: SJ2.1 37.59,75.06 36.83,74.3 35.56,74.3 U1.D5 | IC1.9 35.24,55.08 v35.24,55.4
  Bottom 0.254: U1.D5 33.66,56.98 v35.24,55.4
DIGITAL6
  Top 0.254: SJ3.1 27.43,74.8 27.94,74.3 29.21,74.3 U1.D6
  Top 0.305: U1.D6 31.11,58.07 IC1.10
DIGITAL7
  Top 0.254: SJ4.1 19.68,76.2 21.59,74.3 26.67,74.3 U1.D7
  Top 0.305: U1.D7 28.57,59.48 IC1.11
DIGITAL8
  Top 0.254: SJ5.1 9.53,76.2 11.43,74.3 20.32,74.3 20.95,73.66 23.24,73.66 U1.D8
  Top 0.305: U1.D8 24.51,62.41 IC1.12
DIGITAL9  (via drill 0.5)
  Top 0.254: v19.68,78.74 19.68,87.31 17.78,89.22 SJ7.1
  Top 0.305: U1.D9 21.97,63.82 IC1.13
  Bottom 0.305: v19.68,78.74 21.97,76.45 U1.D9
DIGITAL10
  Top 0.305: U1.D10 19.43,65.23 IC1.14
DIGITAL11
  Top 0.305: U1.D11 16.89,66.64 IC1.15
DIGITAL12
  Top 0.305: U1.D12 14.35,68.05 IC1.16
DIGITAL13
  Top 0.305: U1.D13 11.81,68.48 IC1.17
DIGITAL14  (via drill 0.5)
  Top 0.254: 97.79,45.72 97.16,45.09 93.77,45.09 IC3.30 91.87,46.99 v91.44,46.99
  Top 0.305: 97.79,45.72 97.79,71.75 U2.D0
  Bottom 0.254: v91.44,46.99 82.55,55.88 57.15,55.88 56.52,56.52 56.52,59.05 57.15,59.69 X3.4
DIGITAL15  (via drill 0.5)
  Top 0.254: 97.16,46.35 96.52,45.72 94.27,45.72 IC3.31 91.73,48.26 v91.44,48.26
  Top 0.305: 97.16,46.35 97.16,69.85 U2.D1
  Bottom 0.254: X3.5 82.55,57.15 v91.44,48.26
DIGITAL16
  Top 0.254: 96.52,46.99 95.89,46.35 94.77,46.35 IC3.32
  Top 0.305: 96.52,46.99 96.52,67.94 U2.D2
DIGITAL17  (via drill 0.5)
  Top 0.254: IC3.1 95.89,51.28 | v89.22,78.74 89.22,87.95 87.63,89.53 SJ13.1
  Top 0.305: 95.89,51.28 95.89,66.04 U2.D3
  Bottom 0.254: U2.D3 89.53,78.42 v89.22,78.74
DIGITAL18
  Top 0.254: IC3.2 95.25,51.78 | SJ8.1 97.92,75.06 97.16,74.3 88.9,74.3 U2.D4
  Top 0.305: 95.25,51.78 95.25,64.14 U2.D4
DIGITAL19  (via drill 0.5)
  Top 0.254: SJ9.1 88.39,75.06 87.63,74.3 86.36,74.3 U2.D5 | IC3.9 86.04,55.08 v86.04,55.4
  Bottom 0.254: U2.D5 84.45,56.98 v86.04,55.4
DIGITAL20
  Top 0.254: SJ10.1 78.23,74.8 78.74,74.3 80.01,74.3 U2.D6
  Top 0.305: U2.D6 81.92,58.07 IC3.10
DIGITAL21
  Top 0.254: SJ11.1 70.48,76.2 72.39,74.3 77.47,74.3 U2.D7
  Top 0.305: U2.D7 79.38,59.48 IC3.11
DIGITAL22
  Top 0.254: SJ12.1 60.33,76.2 62.23,74.3 71.12,74.3 71.75,73.66 74.04,73.66 U2.D8
  Top 0.305: U2.D8 75.31,62.41 IC3.12
DIGITAL23  (via drill 0.5)
  Top 0.254: v70.48,78.74 70.48,87.31 68.58,89.22 SJ14.1
  Top 0.305: U2.D9 72.77,63.82 IC3.13
  Bottom 0.305: v70.48,78.74 72.77,76.45 U2.D9
DIGITAL24
  Top 0.305: U2.D10 70.23,65.23 IC3.14
DIGITAL25
  Top 0.305: U2.D11 67.69,66.64 IC3.15
DIGITAL26
  Top 0.305: U2.D12 65.15,68.05 IC3.16
DIGITAL27
  Top 0.305: U2.D13 62.61,68.48 IC3.17
GND
  pour Top: -1.27,100.33 50.8,100.33 50.8,-1.27 -1.27,-1.27
  pour Bottom: -1.27,100.33 50.8,100.33 50.8,-1.27 -1.27,-1.27
GND1
  pour Top: 49.53,100.33 101.6,100.33 101.6,-1.27 49.53,-1.27
  pour Bottom: 49.53,100.33 101.6,100.33 101.6,-1.27 49.53,-1.27
N$1
  Top 0.254: R2.1 SJ1.2
N$2
  Top 0.203: 17.14,76.2 18.41,76.2
N$3
  Top 0.254: R3.1 SJ2.2
N$4
  Top 0.203: 6.99,76.2 8.26,76.2
N$5
  Top 0.254: R4.1 SJ3.2
N$6  (via drill 0.5)
  Top 0.254: S1.2 3.38,62.75 v3.17,62.55
  Bottom 0.254: BATT1.+ 10.16,11.43 3.17,18.41 v3.17,62.55
N$7
  Top 0.254: R5.1 SJ4.2
N$8
  Top 0.254: SJ6.2 R7.1
N$9
  Top 0.254: R6.1 SJ5.2
N$10
  Top 0.254: IC1.7 41.37,54.36 X2.P$1 42.12,57.27 C7.1
N$11
  Top 0.254: SJ7.2 14.73,92.2 IC2.1
N$12  (via drill 0.5)
  Top 0.254: v26.67,41.91 C4.1
  Bottom 0.254: v26.67,41.91 26.67,48.26 20.32,54.61 X1.6
N$13
  Top 0.203: 27.3,76.2 26.04,76.2
N$14
  Top 0.203: 37.47,76.2 36.2,76.2
N$15
  Top 0.203: 46.99,76.2 45.72,76.2
N$16
  Top 0.203: 36.83,90.81 36.83,92.08
N$17
  Top 0.203: 17.78,90.81 17.78,92.08
N$18
  Top 0.254: IC1.8 37.37,55.06 X2.P$2 36.62,57.27 C8.1
N$19
  Top 0.254: R9.1 SJ8.2
N$20
  Top 0.254: R10.1 SJ9.2
N$21
  Top 0.254: R11.1 SJ10.2
N$22
  Top 0.254: R12.1 SJ11.2
N$23
  Top 0.254: R13.1 SJ12.2
N$24
  Top 0.305: R14.2 90.59,96.1 LED42.A
N$25
  Top 0.254: SJ13.2 R14.1
N$26
  Top 0.254: SJ14.2 65.53,92.2 IC4.1
N$27  (via drill 0.5)
  Top 0.254: v77.47,41.91 C12.1
  Bottom 0.254: v77.47,41.91 77.47,48.26 71.12,54.61 X3.6
N$28
  Top 0.203: 57.78,76.2 59.05,76.2
N$29
  Top 0.305: R7.2 39.79,96.1 LED21.A
N$30
  Top 0.203: 67.94,76.2 69.22,76.2
N$31
  Top 0.203: 78.11,76.2 76.83,76.2
N$32
  Top 0.203: 88.27,76.2 87,76.2
N$33
  Top 0.203: 97.79,76.2 96.52,76.2
N$34
  Top 0.203: 87.63,90.81 87.63,92.08
N$35
  Top 0.203: 68.58,90.81 68.58,92.08
N$36  (via drill 0.5)
  Top 0.254: S2.2 54.18,62.75 v53.98,62.55
  Bottom 0.254: BATT2.+ 60.96,11.43 53.98,18.41 v53.98,62.55
N$37
  Top 0.254: IC3.7 92.17,54.36 X4.P$1 92.92,57.27 C15.1
N$38
  Top 0.254: IC3.8 88.17,55.06 X4.P$2 87.42,57.27 C16.1
RESET  (via drill 0.5)
  Top 0.254: IC1.29 43.75,43.18 v43.81,43.18 R1.1 | v31.75,41.91 C4.2
  Top 0.305: v45.09,27.94 18.73,27.94 15.88,25.08 U1.RESET
  Bottom 0.305: v45.09,27.94 45.09,41.91 v43.81,43.18 33.02,43.18 v31.75,41.91
RESET1  (via drill 0.5)
  Top 0.254: IC3.29 94.55,43.18 v94.61,43.18 R8.1 | v82.55,41.91 C12.2
  Top 0.305: v95.89,27.94 69.53,27.94 66.67,25.08 U2.RESET
  Bottom 0.305: v95.89,27.94 95.89,41.91 v94.61,43.18 83.82,43.18 v82.55,41.91
VCC  (via drill 0.5)
  Top 0.254: IC1.6 41.45,53.31 C3.1 | IC2.3 17.36,96.52 C5.1 18.84,96.1 19.68,95.25 19.68,89.53 20.64,88.58 28.26,88.58 29.21,87.63 v29.21,78.74 | R1.2 46.89,42.01 v46.99,41.91 | v39.05,51.12
  Top 0.305: IC1.4 38.67,48.26 v38.1,48.26 | v38.1,48.26 35.27,48.26 IC1.18 32.73,45.72 31.33,45.72 C2.1 30.06,47.73 29.53,48.26 26.04,48.26 | 39.16,51.01 38.1,49.96 v38.1,48.26 | 39.16,51.01 IC1.6 | 26.04,48.26 26.04,48.9 8.89,66.04 6.99,66.04 6.67,65.72 5.2,65.72 S1.1 | 26.04,48.26 C6.1 | 39.16,51.01 v39.05,51.12 | v46.99,26.67 22.23,26.67 20.95,25.4 U1.5V 20.95,22.54 20.64,22.23 18.41,22.23 | 18.41,22.23 13.65,22.23 13.34,22.54 U1.IOREF | 18.41,22.23 U1.3V
  Bottom 0.254: v38.1,48.26 41.91,44.45 44.45,44.45 v46.99,41.91 | v29.21,78.74 29.21,76.2 30.48,74.93 | v39.05,51.12 38.1,52.07
  Bottom 0.305: v46.99,26.67 v46.99,41.91 | 30.48,74.93 35.88,74.93 37.47,73.34 37.47,52.7 38.1,52.07
VCC1  (via drill 0.5)
  Top 0.254: IC3.6 92.25,53.31 C11.1 | IC4.3 68.16,96.52 C13.1 69.64,96.1 70.48,95.25 70.48,89.53 71.44,88.58 79.06,88.58 80.01,87.63 v80.01,78.74 | R8.2 97.69,42.01 v97.79,41.91 | v89.85,51.12
  Top 0.305: IC3.4 89.47,48.26 v88.9,48.26 | v88.9,48.26 86.07,48.26 IC3.18 83.53,45.72 82.13,45.72 C10.1 80.86,47.73 80.33,48.26 76.83,48.26 | 89.96,51.01 88.9,49.96 v88.9,48.26 | 89.96,51.01 IC3.6 | 76.83,48.26 76.83,48.9 59.69,66.04 57.78,66.04 57.47,65.72 56,65.72 S2.1 | 76.83,48.26 C14.1 | 89.96,51.01 v89.85,51.12 | v97.79,26.67 73.03,26.67 71.75,25.4 U2.5V 71.75,22.54 71.44,22.23 69.22,22.23 | 69.22,22.23 64.45,22.23 64.14,22.54 U2.IOREF | 69.22,22.23 U2.3V
  Bottom 0.254: v88.9,48.26 92.71,44.45 95.25,44.45 v97.79,41.91 | v80.01,78.74 80.01,76.2 81.28,74.93 | v89.85,51.12 88.9,52.07
  Bottom 0.305: v97.79,26.67 v97.79,41.91 | 81.28,74.93 86.68,74.93 88.27,73.34 88.27,52.7 88.9,52.07

## Text on the board
tNames: REV 2.0 | REV 2.0 | MAKERS | MAKERS | EXHIBITS | EXHIBITS | Assembly by | Assembly by | Parts provided by | Parts provided by | 2015 Maker | 2015 Maker
_tsilk: REV 2.0 | REV 2.0 | C5 | R7 | C5 | R7 | SJ7 | SJ6 | SJ7 | SJ6 | IC2 | LED21 | IC2 | LED21 | LED1 | LED3 | LED5 | LED7 | LED9 | LED11 | LED13 | LED15 | LED17 | LED19 | LED1 | LED3 | LED5 | LED7 | LED9 | LED11 | LED13 | LED15 | LED17 | LED19 | MAKERS | MAKERS | EXHIBITS | EXHIBITS | LED2 | LED4 | LED6 | LED8 | LED10 | LED12 | LED14 | LED16 | LED18 | LED20 | LED2 | LED4 | LED6 | LED8 | LED10 | LED12 | LED14 | LED16 | LED18 | LED20 | R6 | SJ5 | R5 | SJ4 | SJ3 | R3 | SJ2 | R2 | R6 | SJ5 | R5 | SJ4 | SJ3 | R3 | SJ2 | R2 | R4 | R4 | SJ1 | SJ1 | Digital I/O | Digital I/O | Digital I/O | Digital I/O | SCL | SDA | ARef | SCL | SDA | ARef | gnd | 13 | 12 | 11 | 10 | 9 | 8 | 7 | 6 | 5 | 4 | 3 | 2 | 1 | 0 | gnd | 13 | 12 | 11 | 10 | 9 | 8 | 7 | 6 | 5 | 4 | 3 | 2 | 1 | 0 | C8 | C7 | C8 | C7 | S1 | S1 | X2 | X2 | C3 | C3 | Assembly by | Assembly by | IC1 | IC1 | C2 | C2 | C1 | R1 | C1 | R1 | Parts provided by | C6 | Parts provided by | C6 | C4 | C4 | 2015 Maker | 2015 Maker | IOr | RST | 3v | 5v | Gnd | Vin | 0 | 1 | 2 | 3 | 4 | 5 | IOr | RST | 3v | 5v | Gnd | Vin | 0 | 1 | 2 | 3 | 4 | 5 | Analog In | Analog In
_bsilk: BLK | BLK | BRN | BRN | RED | RED | ORG | ORG | YEL | YEL | GRN | GRN | X1 | X1 | BATT1 | BATT1